# Altium PCB Solens.PcbDoc (part 1 of 3)
Units mil, origin at the board's own origin, x right, y up, seen from the top; angles counter-clockwise.
Board outline 5511.81 x 2755.91 mil, 4 copper layers (Top Layer, Signal Layer 2, Signal Layer 1, Bottom Layer), stack 65.08 mil thick; 208 components, 216 nets, 806 pads, 433 vias.
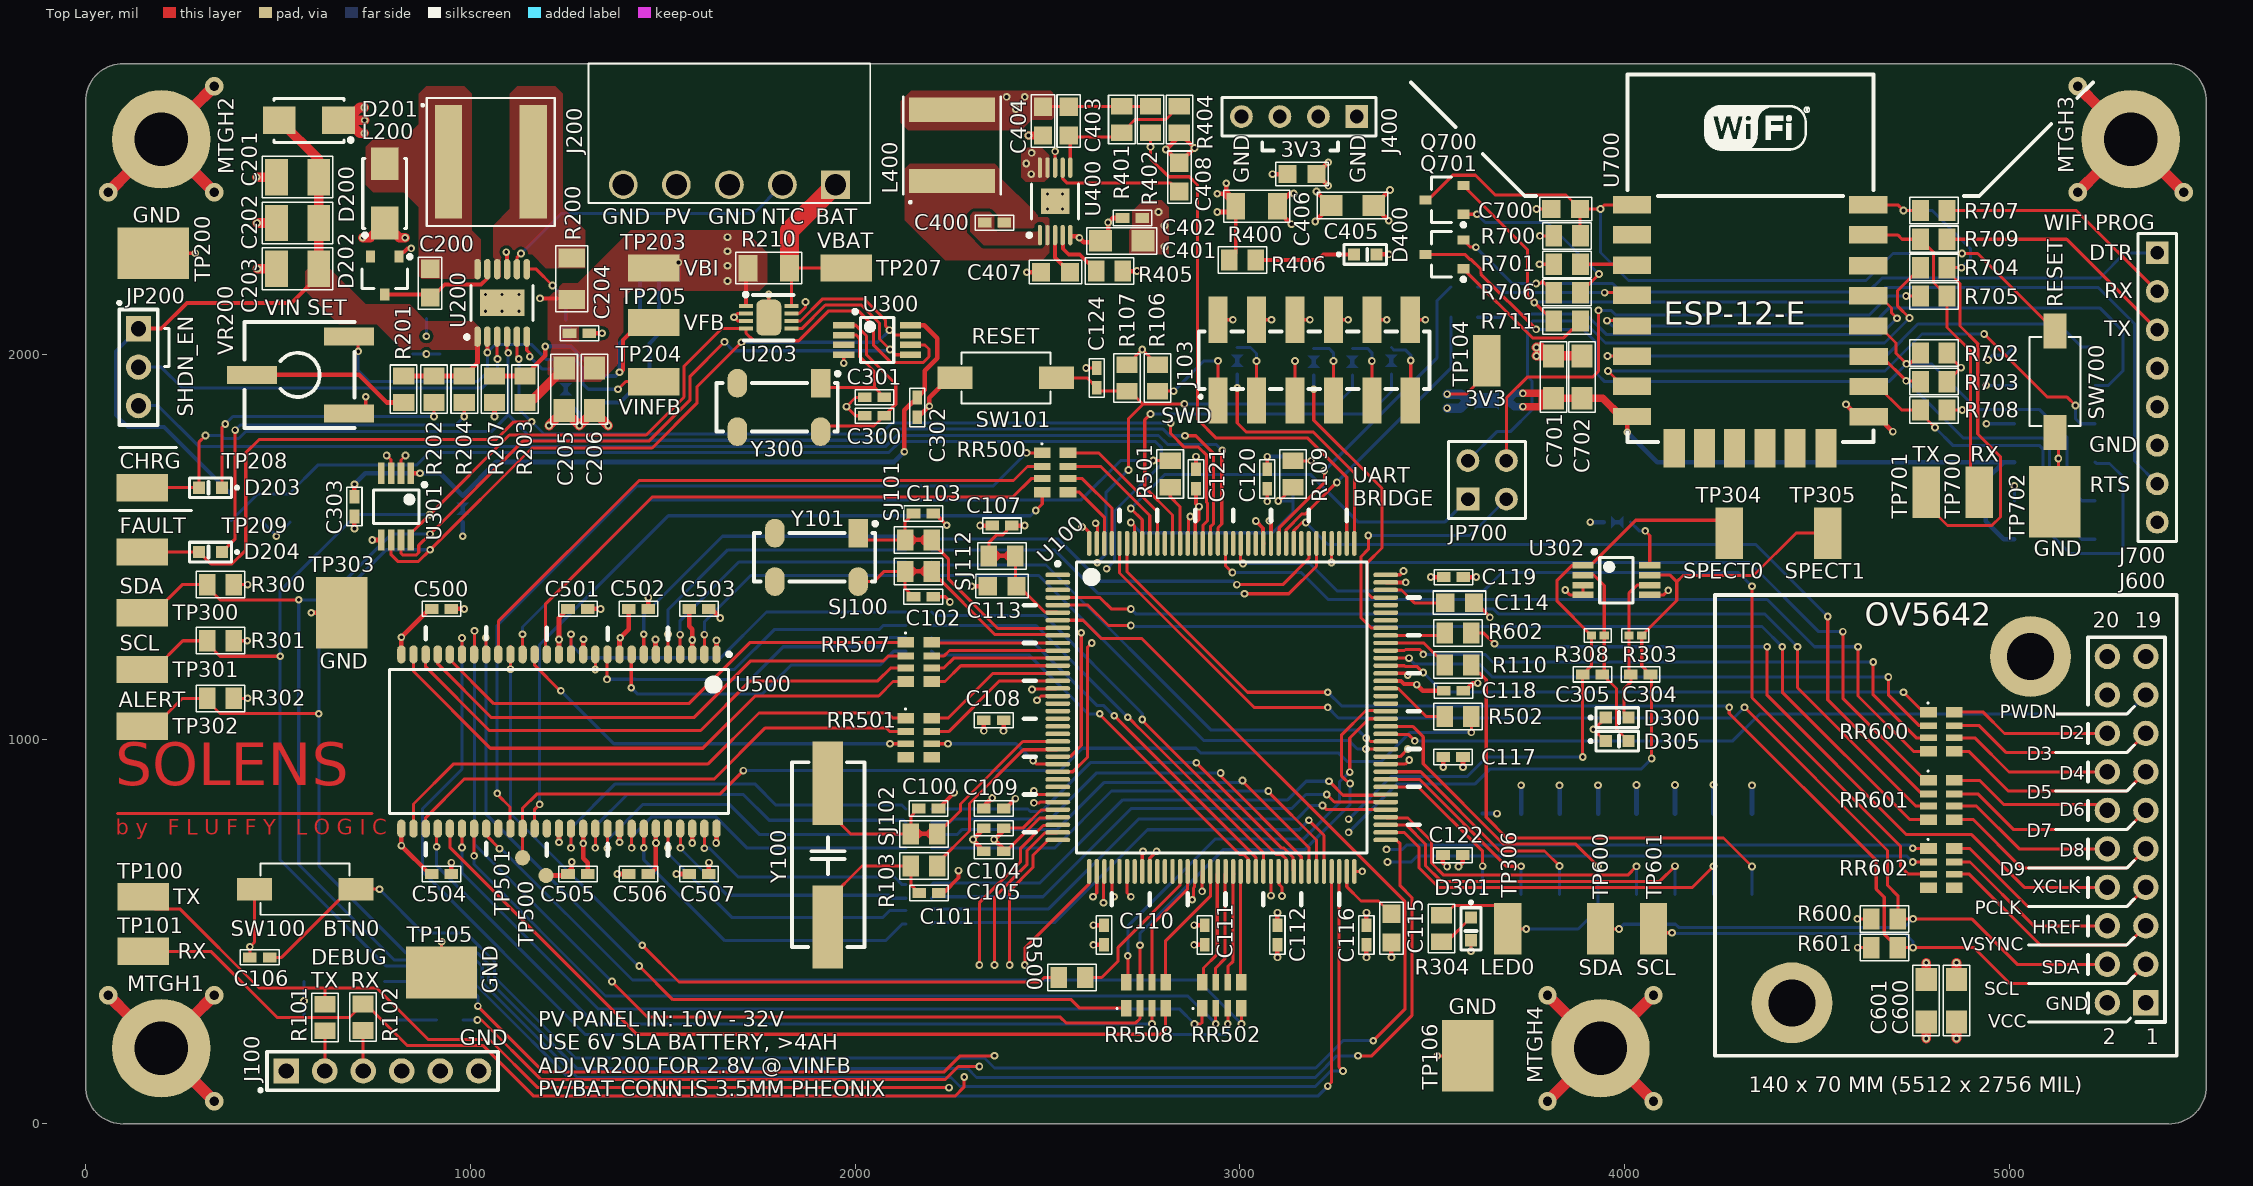
[diagram p0: Top Layer view]
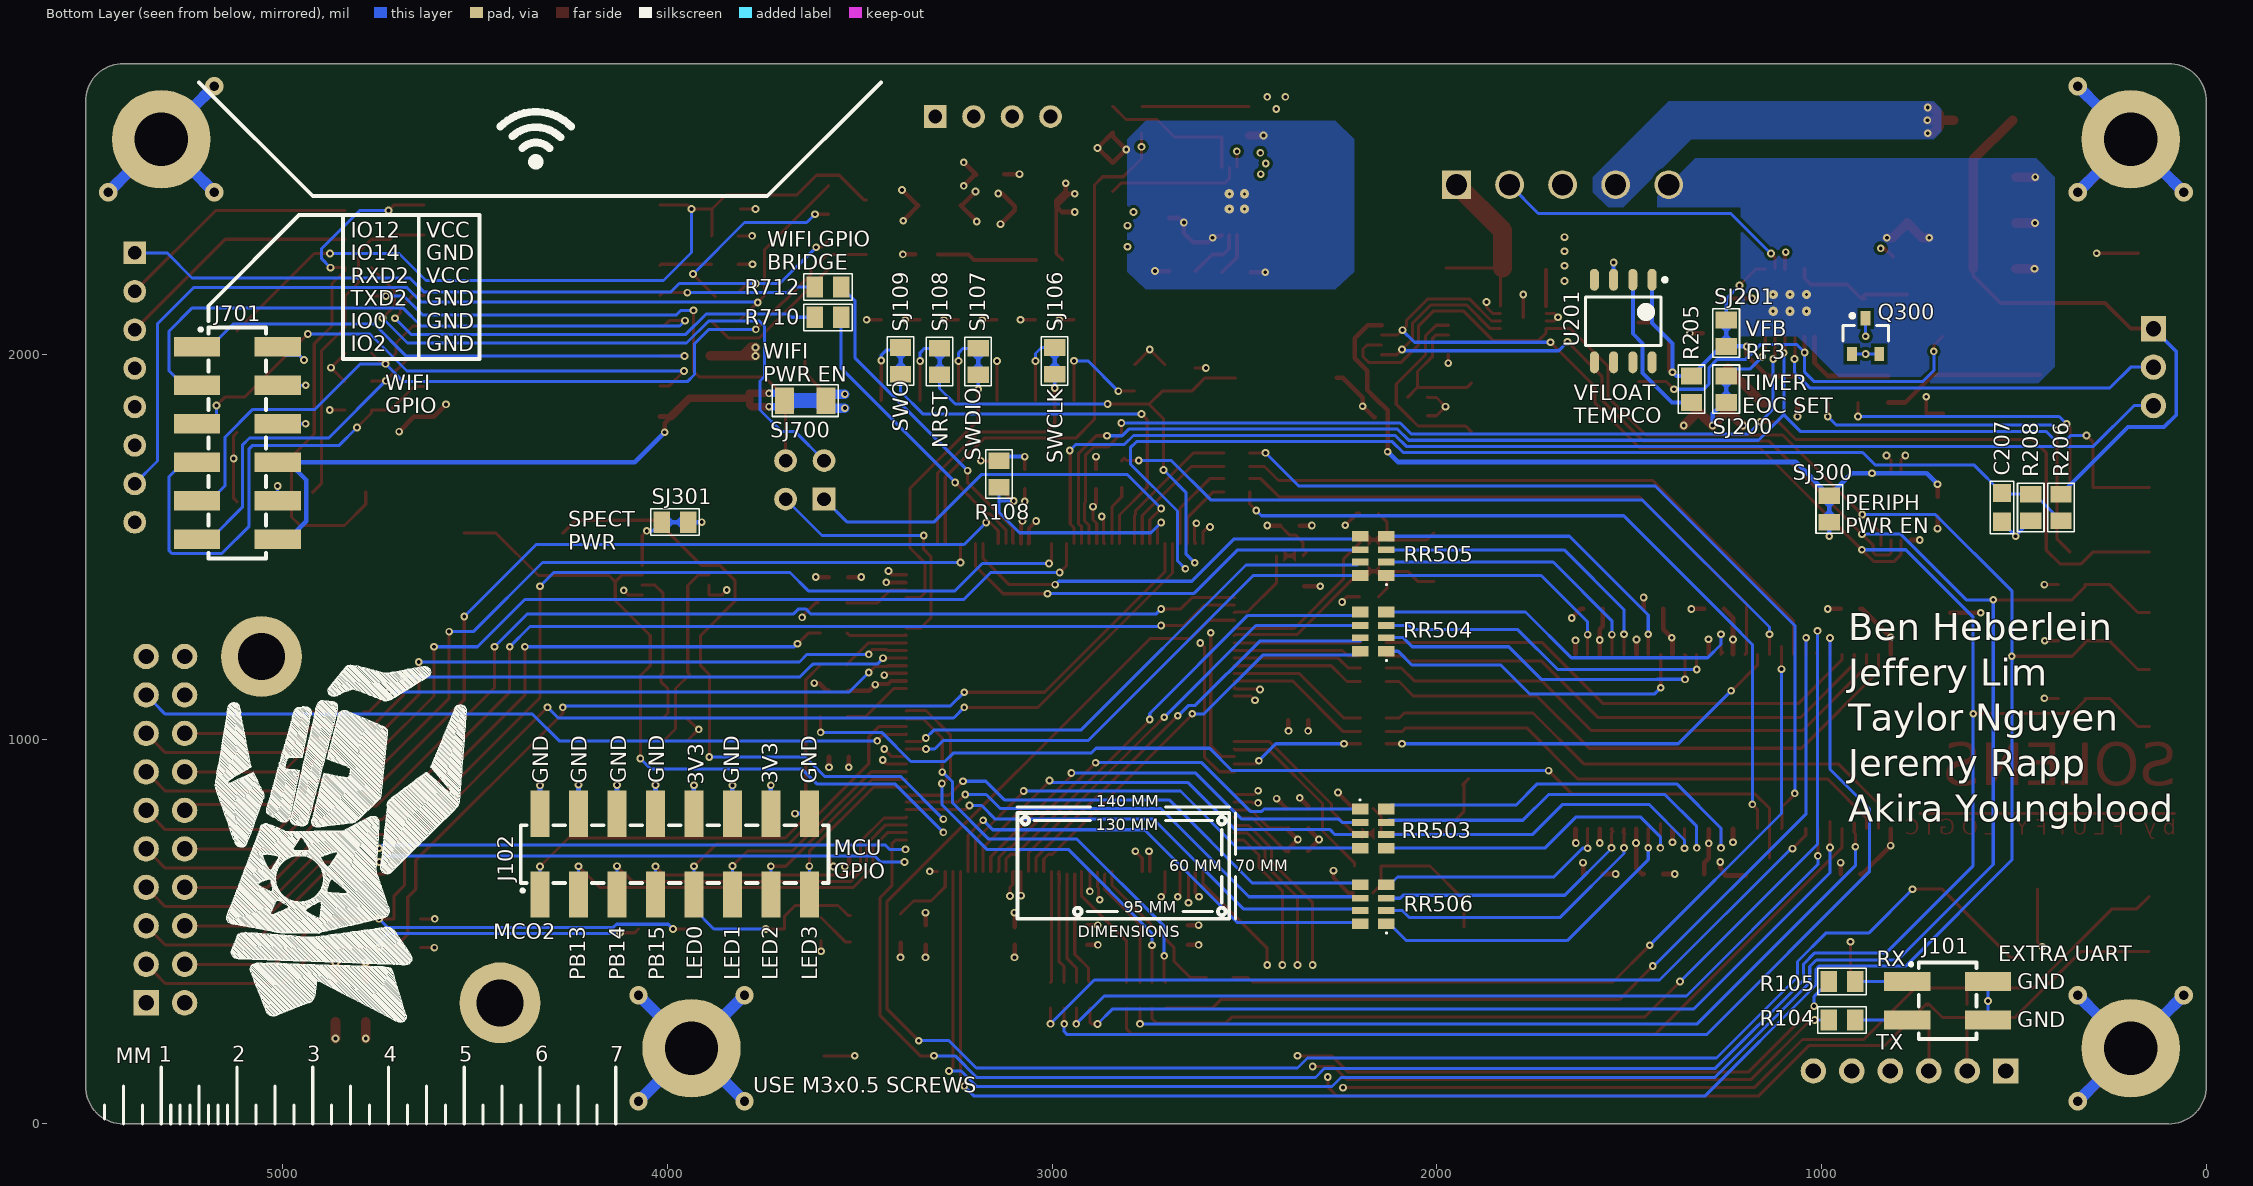
[diagram p1: Bottom Layer view, seen from below]
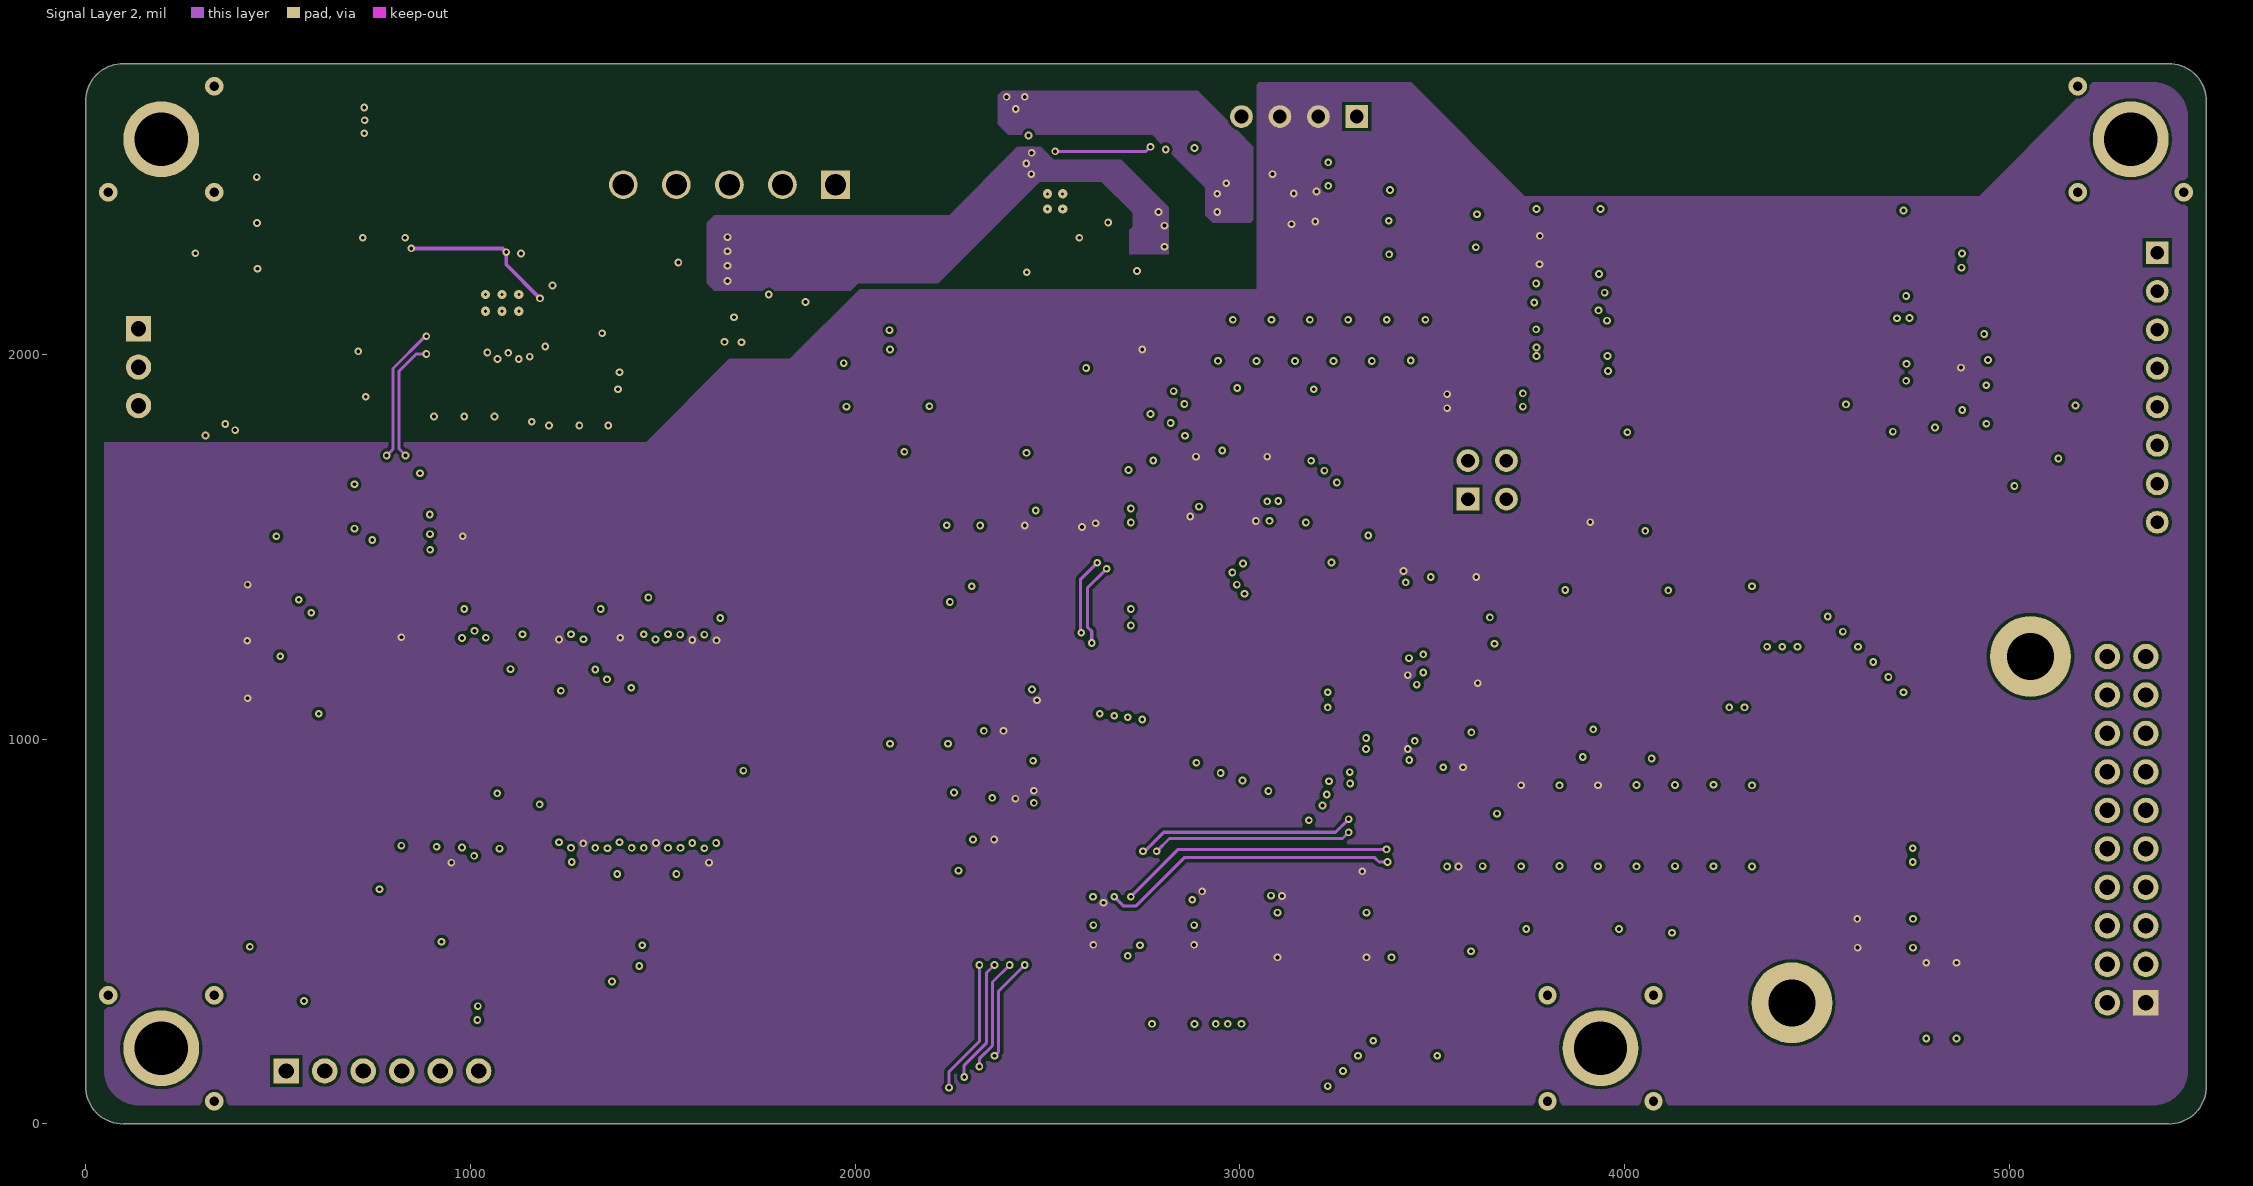
[diagram p2: Signal Layer 2]
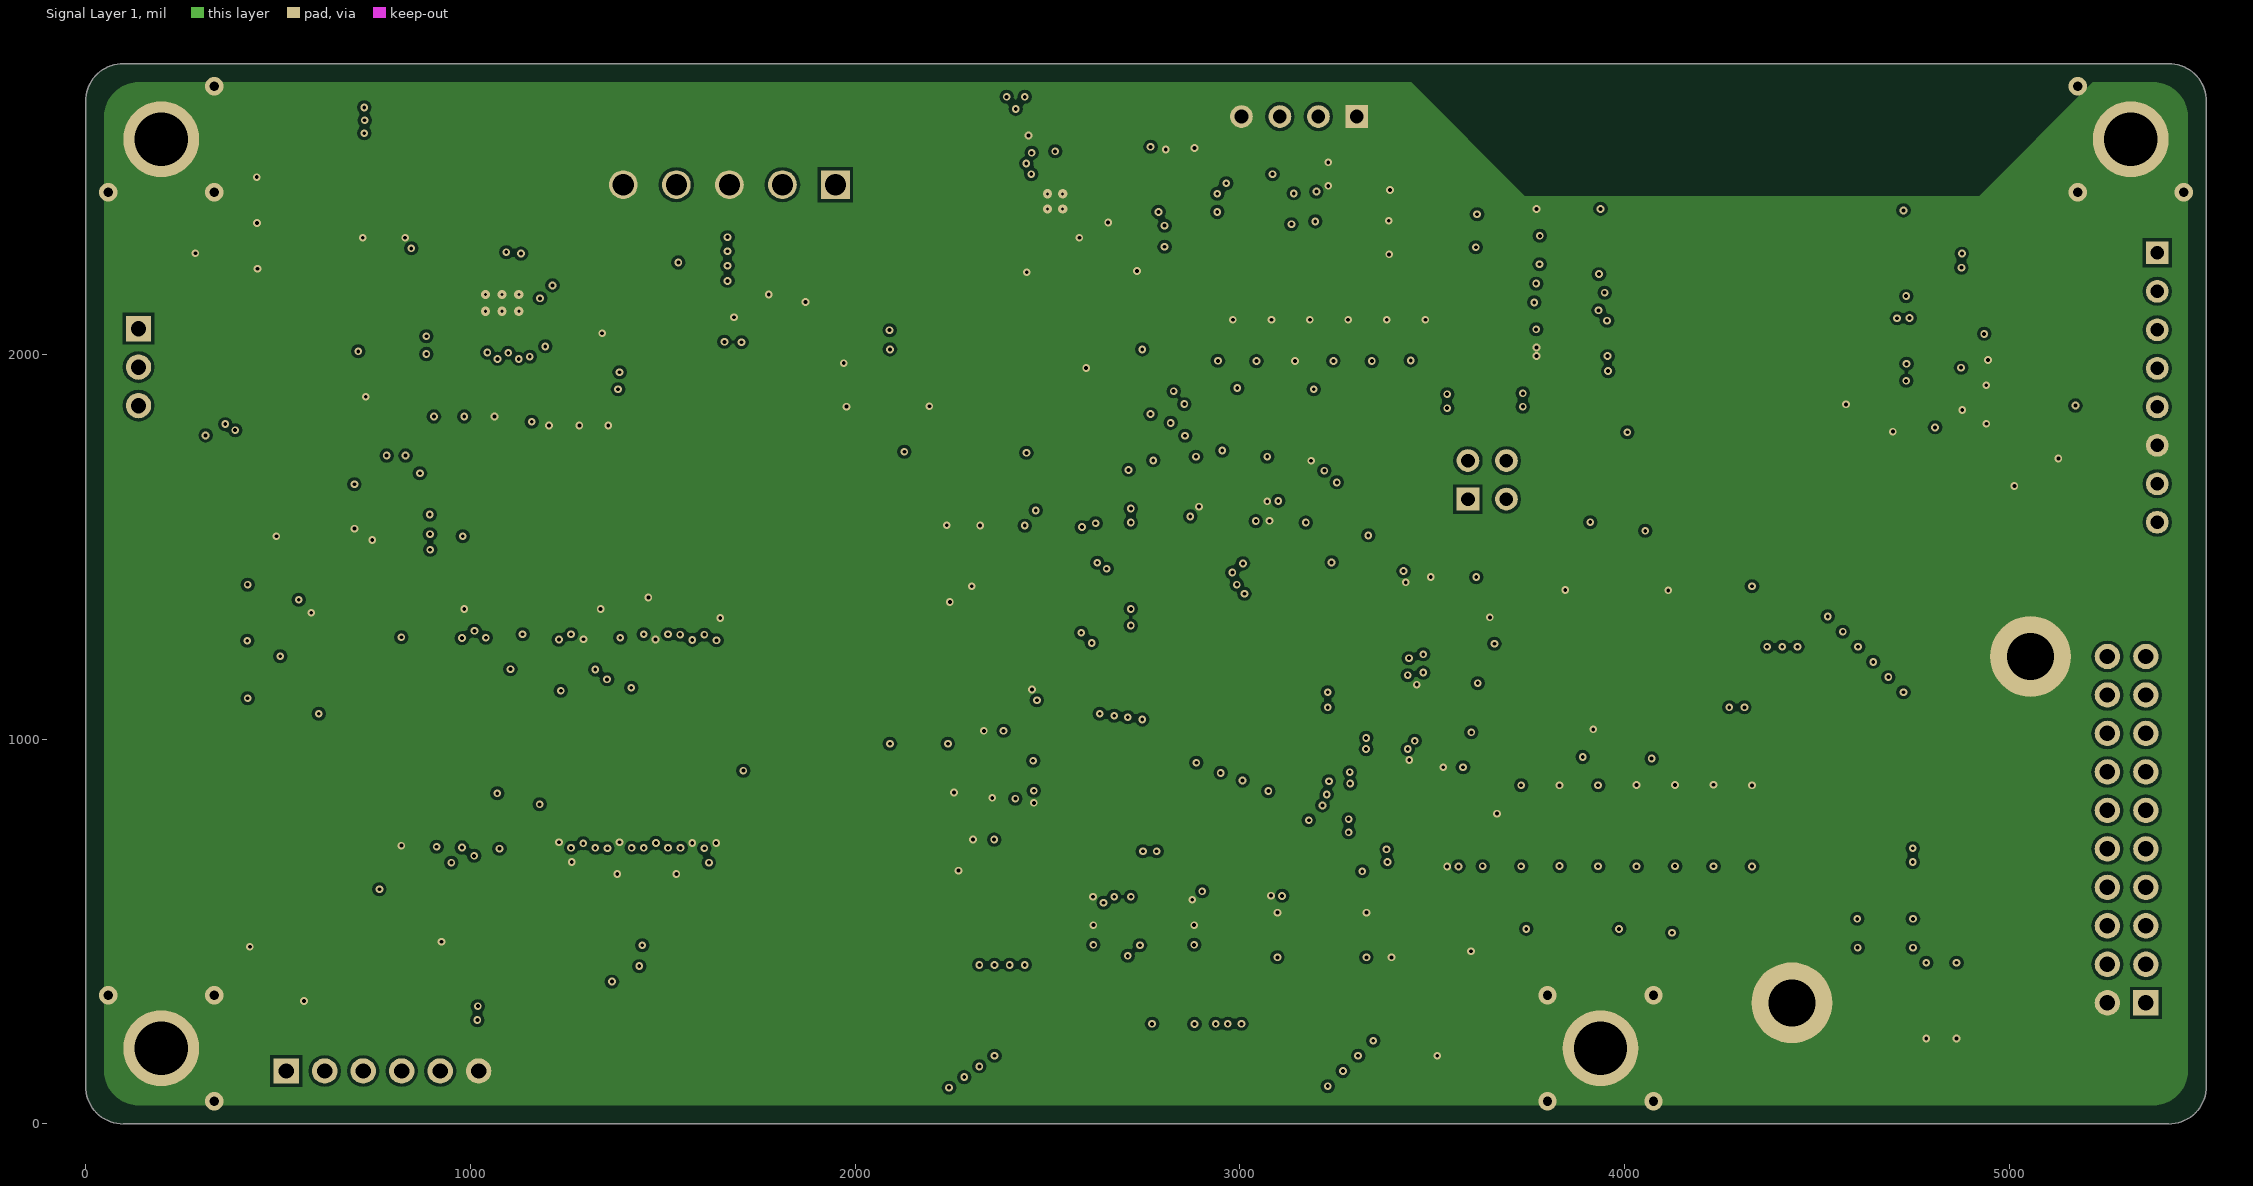
[diagram p3: Signal Layer 1]

## Layer stack, top to bottom
Top Solder: solder mask 0.4, Solder Resist, Dk 3.5
Top Layer: signal copper 1.37
Dielectric 1: core 9.8, 2x2116, Dk 4.2
Signal Layer 2: signal copper 1.37
Dielectric 4: prepreg 40, Dk 4.2
Signal Layer 1: signal copper 1.37
Dielectric 3: core 9.8, 2x2116, Dk 4.2
Bottom Layer: signal copper 1.37
Bottom Solder: solder mask 0.4, Solder Resist, Dk 3.5

## Board outline
0,98.43 ccw(c98.42,98.43) 98.43,0 5413.39,0 ccw(c5413.39,98.43) 5511.81,98.43 5511.81,2657.48 ccw(c5413.39,2657.48) 5413.39,2755.91 98.43,2755.91 ccw(c98.42,2657.48) 0,2657.48

## Design rules (kind name [scope] priority, off if disabled: settings)
Clearance Clearance_SJ [InComponent('SJ*') And (IsFill Or IsPad Or IsTrack) vs InComponent('SJ*') And (IsFill Or IsPad Or IsTrack)] p1: gap=0 // Allow overlapped tracks/pads/fills in SJ*
Clearance [All] p2: gap=8
ComponentClearance ComponentClearance_JP70x [InComponent('JP700') vs InComponent('JP701')] p1: gap=0 collisioncheckmode=3 verticalgap=0 showdistances=FALSE
ComponentClearance ComponentClearance_CAMERA [InComponent('J600') vs InComponent('RR6*') Or InComponent('R6*') Or InComponent('C6*')] p2: gap=0 collisioncheckmode=3 verticalgap=0 showdistances=FALSE
ComponentClearance [All] p3: gap=1 collisioncheckmode=3 verticalgap=10 showdistances=FALSE
HoleSize [All] p1: absolutevalues=TRUE maxlimit=250 minlimit=8 maxpercent=80.000 minpercent=20.000
MaxMinImpedance Width_FAST [InNetClass('FAST')] p1: minimum=70.00 maximum=80.00 // Trace width for high-speed (pseudo-impedance controlled) traces
MinimumSolderMaskSliver [All] p1: minsoldermaskwidth=4
PlaneClearance [All] p1: clearance=12
PolygonConnect PolygonConnect_PowerPlane [(InNet('3V3') OR InNet('GND') OR InNet('NetC400_1'))] p1: connectstyle=Direct reliefconductorwidth=10 reliefentries=4 polygonreliefangle="90 Angle" airgapwidth=10 // Remove thermals to vias/pins on power planes
PolygonConnect PolygonConnect_PWR [InNetClass('PWR')] p2: connectstyle=Direct reliefconductorwidth=10 reliefentries=4 polygonreliefangle="90 Angle" airgapwidth=10 // Remove thermals to vias/pins on power planes
PolygonConnect PolygonConnect_HVY [InNetClass('HVY')] p3: connectstyle=Direct reliefconductorwidth=10 reliefentries=4 polygonreliefangle="90 Angle" airgapwidth=10 // Remove thermals to vias/pins on power planes
PolygonConnect [All] p4: connectstyle=Relief reliefconductorwidth=10 reliefentries=4 polygonreliefangle="90 Angle" airgapwidth=10
RoomDefinition Z2 [InComponentClass('Z2')] p1 off: confinementstyle=ConfineIn formatcopy=TRUE lockcomponents=FALSE outline 2066.93,2165.35 3395.67,2165.35 3444.88,2214.57 3444.88,2805.12 2066.93,2805.12
RoomDefinition Z6 [InComponentClass('Z6')] p2 off: confinementstyle=ConfineIn formatcopy=TRUE lockcomponents=FALSE outline 4183.07,147.64 5561.02,147.64 5561.02,1412.99 4183.07,1412.99
RoomDefinition Z1 [InComponentClass('Z1')] p3 off: confinementstyle=ConfineIn formatcopy=TRUE lockcomponents=FALSE outline -49.21,1771.65 1462.32,1771.65 1663.85,1970.4 1815.01,1970.4 2066.93,2218.83 2066.93,2805.12 -49.21,2805.12
RoomDefinition Z7 [InComponentClass('Z7')] p4 off: confinementstyle=ConfineIn formatcopy=TRUE lockcomponents=FALSE outline 3986.22,1673.23 4625.98,1673.23 4822.83,1476.38 5561.02,1476.38 5561.02,2805.12 3444.88,2805.12 3444.88,2460.63 3444.88,2362.2 3444.88,2214.57 3838.58,1820.87
RoutingVias RoutingVias_PWR [InNetClass('PWR')] p1 off: holewidth=20 width=46 viastyle="Through Hole" minholewidth=20 minwidth=46 maxholewidth=48 maxwidth=64 // Big vias for power nets
RoutingVias [All] p2: holewidth=10 width=20 viastyle="Through Hole" minholewidth=10 minwidth=20 maxholewidth=32 maxwidth=64
ShortCircuit ShortCircuit_SJ [InComponent('SJ*') And (IsFill Or IsPad Or IsTrack) vs InComponent('SJ*') And (IsFill Or IsPad Or IsTrack Or IsRegion)] p1: allowed=TRUE // Allow shorted pads/fills/tracks in SJ*
ShortCircuit ShortCircuit_MTGH [InComponent('MTGH*') And (IsFill Or IsPad Or IsTrack) vs InComponent('MTG*') And (IsFill Or IsPad Or IsTrack)] p2: allowed=TRUE // Allow shorted pads/fills/tracks in SJ*
ShortCircuit [All] p3: allowed=FALSE
SilkToSilkClearance [All] p1: silktosilkclearance=5
SilkToSolderMaskClearance [IsPad] p1: minsilkscreentomaskgap=2 clearancetoexposedcopper=TRUE
SolderMaskExpansion SolderMaskExpansion_VIA [IsVia] p1: expansion=-20
SolderMaskExpansion [All] p2: expansion=3
Width Width_HVY [InNetClass('HVY')] p1: maxlimit=64 minlimit=8 preferedwidth=8
Width Width_MTGH [InComponent('MTGH*')] p2: maxlimit=120 minlimit=8 preferedwidth=8
Width Width_PWR [InNetClass('PWR')] p3: maxlimit=64 minlimit=8 preferedwidth=8 // Expanded width for power nets
Width [All] p4: maxlimit=12 minlimit=7 preferedwidth=8
23 further rules are at their usual default settings.

## Classes and differential pairs
net class HVY: 3V3 NetC400_2
net class SPECT[0..1]: SPECT0 SPECT1
net class SD_D[0..15]: SD_D0 SD_D1 SD_D2 SD_D3 SD_D4 SD_D5 SD_D6 SD_D7 SD_D8 SD_D9 SD_D10 SD_D11 SD_D12 SD_D13 SD_D14 SD_D15
net class SD_A[0..11]: SD_A0 SD_A1 SD_A2 SD_A3 SD_A4 SD_A5 SD_A6 SD_A7 SD_A8 SD_A9 SD_A10 SD_A11
net class PWR: GND NetC403_2 NetD201_1 SENSE SW VBAT VBAT_INT VCC_ESP VIN
net class FAST: CAM_D0 CAM_D1 CAM_D2 CAM_D3 CAM_D4 CAM_D5 CAM_D6 CAM_D7 CAM_HREF CAM_HREF_U CAM_PCLK CAM_PCLK_U CAM_VSYNC CAM_VSYNC_U CAM_XCLK CAM_XCLK_T NetJ600_9 NetJ600_10 NetJ600_11 NetJ600_12 NetJ600_13 NetJ600_14 NetJ600_15 NetJ600_16 SD_A0 SD_A0_T SD_A1 SD_A1_T SD_A2 SD_A2_T SD_A3 SD_A3_T SD_A4 SD_A4_T SD_A5 SD_A5_T SD_A6 SD_A6_T SD_A7 SD_A7_T SD_A8 SD_A8_T SD_A9 SD_A9_T SD_A10 SD_A10_T SD_A11 SD_A11_T SD_BA0 SD_BA0_T SD_BA1 SD_BA1_T SD_CKE1 SD_CKE1_T SD_CLK SD_CLK_T SD_D0 SD_D0_T SD_D1 SD_D1_T SD_D2 SD_D2_T SD_D3 SD_D3_T SD_D4 SD_D4_T SD_D5 SD_D5_T SD_D6 SD_D6_T SD_D7 SD_D7_T SD_D8 SD_D8_T SD_D9 SD_D9_T SD_D10 SD_D10_T SD_D11 SD_D11_T SD_D12 SD_D12_T SD_D13 SD_D13_T SD_D14 SD_D14_T SD_D15 SD_D15_T SD_NBL0 SD_NBL0_T SD_NBL1 SD_NBL1_T SD_NCAS SD_NCAS_T SD_NE1 SD_NE1_T SD_NRAS SD_NRAS_T SD_NWE SD_NWE_T
net class CAM_D[0..7]: CAM_D0 CAM_D1 CAM_D2 CAM_D3 CAM_D4 CAM_D5 CAM_D6 CAM_D7
component class Z7: C700 C701 C702 J700 J701 JP700 Q700 Q701 R700 R701 R702 R703 R704 R705 R706 R707 R708 R709 R710 R711 R712 SJ700 SW700 TP700 TP701 TP702 U700
component class Z6: C600 C601 J600 R600 R601 R602 RR600 RR601 RR602 TP600 TP601
component class Z3: C300 C301 C302 C303 C304 C305 D300 D301 D305 Q300 R300 R301 R302 R303 R304 R308 SJ300 SJ301 TP300 TP301 TP302 TP303 TP304 TP305 TP306 U300 U301 U302 Y300
component class Z1: C100 C101 C102 C103 C104 C105 C106 C107 C108 C109 C110 C111 C112 C113 C114 C115 C116 C117 C118 C119 C120 C121 C122 C124 J100 J101 J102 J103 R101 R102 R103 R104 R105 R106 R107 R108 R109 R110 SJ100 SJ101 SJ102 SJ106 SJ107 SJ108 SJ109 SJ112 SW100 SW101 TP100 TP101 TP104 TP105 TP106 U100 Y100 Y101
component class Z5: C500 C501 C502 C503 C504 C505 C506 C507 R500 R501 R502 RR500 RR501 RR502 RR503 RR504 RR505 RR506 RR507 RR508 TP500 TP501 U500
component class Z4: C400 C401 C402 C403 C404 C405 C406 C407 C408 D400 J400 L400 R400 R401 R402 R404 R405 R406 U400
component class Z2: C200 C201 C202 C203 C204 C205 C206 C207 D200 D201 D202 D203 D204 J200 JP200 L200 R200 R201 R202 R203 R204 R205 R206 R207 R208 R210 SJ200 SJ201 TP200 TP203 TP204 TP205 TP207 TP208 TP209 U200 U201 U203 VR200
component class Solens: MTGH1 MTGH2 MTGH3 MTGH4

## Components (designator, comment, footprint, x,y, rotation, side; value= is the part's Value field where it differs from the comment)
C100 "27p, 16V, 0402" CAP_0402 2190.94,819.88 r0 top
C101 "27p, 16V, 0402" CAP_0402 2191.93,600.39 r0 top
C102 "18p, 16V, 0402" CAP_0402 2177.17,1370.08 r0 top
C103 "18p, 16V, 0402" CAP_0402 2177.17,1586.61 r0 top
C104 "100n, 16V, 0402" CAP_0402 2360.24,768.7 r180 top
C105 "100n, 16V, 0402" CAP_0402 2360.24,708.66 r180 top
C106 "100n, 16V, 0402" CAP_0402 452.76,433.07 r180 top
C107 "100n, 16V, 0402" CAP_0402 2381.89,1555.12 r180 top
C108 "100n, 16V, 0402" CAP_0402 2360.24,1049.21 r180 top
C109 "100n, 16V, 0402" CAP_0402 2360.24,819.88 r180 top
C110 "100n, 16V, 0402" CAP_0402 2646.65,491.14 r90 top
C111 "100n, 16V, 0402" CAP_0402 2908.46,491.14 r90 top
C112 "100n, 16V, 0402" CAP_0402 3097.44,491.14 r90 top
C113 "2u2, 10V, 0805" CAP_0805 2381.89,1397.64 r0 top
C114 "2u2, 10V, 0805" CAP_0805 3570.87,1354.58 r0 top
C115 "2u2, 10V, 0805" CAP_0805 3393.7,508.86 r270 top
C116 "100n, 16V, 0402" CAP_0402 3328.74,491.14 r90 top
C117 "100n, 16V, 0402" CAP_0402 3554.13,953.74 r180 top
C118 "100n, 16V, 0402" CAP_0402 3555.12,1125.98 r180 top
C119 "100n, 16V, 0402" CAP_0402 3555.12,1421.26 r180 top
C120 "100n, 16V, 0402" CAP_0402 3070.87,1676.18 r270 top
C121 "100n, 16V, 0402" CAP_0402 2885.83,1676.18 r270 top
C122 "100n, 16V, 0402" CAP_0402 3553.15,698.82 r180 top
C124 "100n, 16V, 0402" CAP_0402 2627.95,1938.98 r90 top
C200 "1u, 35V, 0805" CAP_0805 895.67,2185.04 r270 top
C201 "4u7, 50V, 1210" CAP_1210 551.18,2460.63 r180 top
C202 "4u7, 50V, 1210" CAP_1210 551.18,2341.51 r180 top
C203 "4u7, 50V, 1210" CAP_1210 551.18,2222.39 r180 top
C204 "100n, 16V, 0402" CAP_0402 1283.46,2055.12 r0 top
C205 "10u, 16V, 1206" CAP_1206 1244.09,1909.45 r270 top
C206 "10u, 16V, 1206" CAP_1206 1322.83,1909.45 r270 top
C207 "1u, 35V, 0805 (DNP)" CAP_0805 531.5,1602.36 r270 bottom
C300 "18p, 16V, 0402 (DNP)" CAP_0402 2050.2,1840.55 r180 top
C301 "18p, 16V, 0402 (DNP)" CAP_0402 2050.2,1888.78 r180 top
C302 "100n, 16V, 0402 (DNP)" CAP_0402 2161.42,1862.2 r270 top
C303 "100n, 16V, 0402 (DNP)" CAP_0402 698.82,1604.33 r270 top
C304 "220p, 16V, 0402 (DNP)" CAP_0402 4041.34,1168.31 r180 top
C305 "220p, 16V, 0402 (DNP)" CAP_0402 3916.34,1168.31 r180 top
C400 "100n, 16V, 0402" CAP_0402 2362.2,2342.52 r0 top
C401 "10u, 16V, 1206" CAP_1206 2692.91,2295.25 r180 top
C402 "100n, 16V, 0402" CAP_0402 2720.47,2354.33 r180 top
C403 "10p, 16V, 0805" CAP_0805 2555.12,2606.3 r90 top
C404 "10u, 10V, 0805" CAP_0805 2488.19,2606.3 r90 top
C405 "47u, 10V, 1206" CAP_1206 3292.32,2386.81 r0 top
C406 "10u, 10V, 0805" CAP_0805 3161.42,2468.5 r180 top
C407 "2u2, 10V, 0805" CAP_0805 2520.67,2213.58 r180 top
C408 "10n, 16V, 0805" CAP_0805 2842.52,2460.63 r90 top
C500 "100n, 16V, 0402" CAP_0402 925.2,1338.58 r0 top
C501 "100n, 16V, 0402" CAP_0402 1279.53,1338.58 r0 top
C502 "100n, 16V, 0402" CAP_0402 1437.01,1338.58 r0 top
C503 "100n, 16V, 0402" CAP_0402 1594.49,1338.58 r0 top
C504 "100n, 16V, 0402" CAP_0402 925.2,649.61 r180 top
C505 "100n, 16V, 0402" CAP_0402 1279.53,649.61 r180 top
C506 "100n, 16V, 0402" CAP_0402 1437.01,649.61 r180 top
C507 "100n, 16V, 0402" CAP_0402 1594.49,649.61 r180 top
C600 "47u, 10V, 1206" CAP_1206 4862.2,320.47 r270 top
C601 "10u, 10V, 1206" CAP_1206 4783.46,320.47 r270 top
C700 "1n, 16V, 0805" CAP_0805 3846.46,2377.95 r180 top
C701 "47u, 10V, 1206" CAP_1206 3814.96,1940.94 r90 top
C702 "10u, 10V, 1206" CAP_1206 3888.78,1940.94 r90 top
D200 "CMSH3-40MA, DO-214AC" "SODFL519X262-2N (CMSH3-40MA)" 777.56,2418.28 r90 top
D201 "CMSH3-40MA, DO-214AC" "SODFL519X262-2N (CMSH3-40MA)" 580.71,2608.27 r180 top
D202 "CMPSH1-4, SOT-23F" "SOT95P240X100-3N (CMPSH1-4 TR)" 777.56,2204.72 r270 top
D203 "LED, GRN, 0603 (DNP)" LED_0603 324.8,1653.54 r180 top
D204 "LED, GRN, 0603 (DNP)" LED_0603 324.8,1486.22 r180 top
D300 "LED, GRN, 0603 (DNP)" LED_0603 3980.31,1056.1 r0 top
D301 "LED, RED, 0603 (DNP)" LED_0603 3600.39,506.89 r270 top
D305 "LED, RED, 0603 (DNP)" LED_0603 3980.31,995.08 r0 top
D400 "LED, RED, 0603 (DNP)" LED_0603 3325.79,2259.84 r0 top
J100 "HDR_1x6_100TH_THT" HDR_100TH_1X6 521.65,137.8 r90 top
J101 "HDR_2x2_100TH_SMT (DNP)" HDR_100TH_2X2_SMT 777.56,370.08 r180 bottom
J102 "HDR_2x8_100TH_SMT (DNP)" HDR_100TH_2X8_SMT 4330.71,596.46 r90 bottom
J103 "HDR_2x8_100TH_SMT" HDR_100TH_2X6_SMT 2942.91,1879.92 r90 top
J200 "691322110005, 5p 3.5mm Euro" 691322110005 1673.23,2440.94 r180 top
J400 "HDR_1x4_100TH_THT (DNP)" HDR1X4 3303.94,2618.11 r180 top
J600 "SOK_2x10_100TH_THT" OV5642_HDR_2X10 5354.33,314.96 r0 top
J700 "HDR_1x8_100TH_THT" HDR1X8 5383.86,2263.78 r270 top
J701 "HDR_2x6_100TH_SMT (DNP)" HDR_100TH_2X6_SMT 5222.44,2019.69 r180 bottom
JP200 "HDR_1x3_100TH_THT" HDR_100TH_1X3 137.8,2066.93 r0 top
JP700 "HDR_2x2_100TH_THT" HDR2X2 3592.52,1624.02 r0 top
L200 "NRS8040T150MJGJ" IND_TAIYO_NRS804 1053.15,2500 r0 top
L400 "NR6028T2R2N" IND_TAIYO_NR6028 2251.79,2543.31 r90 top
MTGH1 "M3x0.5 (DNP)" MTGH-M3x0.5-ClipSW 196.85,196.85 r0 top
MTGH2 "M3x0.5 (DNP)" MTGH-M3x0.5-ClipNW 196.85,2559.06 r0 top
MTGH3 "M3x0.5 (DNP)" MTGH-M3x0.5-ClipNE 5314.96,2559.06 r0 top
MTGH4 "M3x0.5 (DNP)" MTGH-M3X0.5 3937.01,196.85 r0 top
Q300 "MMBT3904, SOT-23 (DNP)" SOT90P240X110-3N 885.83,2047.24 r90 bottom
Q700 "2N7002, SOT-23" "SOT95P240X100-3N (CMPSH1-4 TR)" 3531.5,2401.57 r180 top
Q701 "2N7002, SOT-23" "SOT95P240X100-3N (CMPSH1-4 TR)" 3531.5,2259.84 r180 top
R101 "100R, 1/8W, 0805" RES_0805 622.05,276.57 r90 top
R102 "100R, 1/8W, 0805" RES_0805 721.46,277.56 r90 top
R103 "220R, 1/8W, 0805" RES_0805 2179.13,670.28 r180 top
R104 "100R, 1/8W, 0805 (DNP)" RES_0805 946.85,270.08 r0 bottom
R105 "100R, 1/8W, 0805 (DNP)" RES_0805 946.85,370.08 r0 bottom
R106 "0R, 1/8W, 0805 (DNP)" RES_0805 2785.43,1938.98 r270 top
R107 "0R, 1/8W, 0805 (DNP)" RES_0805 2706.69,1938.98 r270 top
R108 "0805 (DNP)" RES_0805 3137.8,1688.98 r270 bottom
R109 "510R, 1/8W, 0805" RES_0805 3137.8,1688.98 r90 top
R110 "49R9, 1/8W, 0805 (DNP)" RES_0805 3566.93,1192.91 r0 top
R200 "80m, 1/4W, 1%, 1206" RES_1206 1263.78,2196.85 r90 top
R201 "22k, 1/8W, 0805" RES_0805 826.77,1909.45 r270 top
R202 "22k, 1/8W, 0805" RES_0805 905.51,1909.45 r270 top
R203 "511k, 1/8W, 0805" RES_0805 1141.73,1909.45 r90 top
R204 "22k, 1/8W, 0805" RES_0805 984.25,1909.45 r270 top
R205 "2k4, 1/8W, 0805 (DNP)" RES_0805 1338.58,1909.45 r90 bottom
R206 "22k, 1/8W, 0805" RES_0805 377.95,1602.36 r270 bottom
R207 "487k, 1/8W, 0805" RES_0805 1062.99,1909.45 r270 top
R208 "1k, 1/8W, 0805" RES_0805 456.69,1602.36 r270 bottom
R210 "25m, 1/2W, 1%, 1206" RES_1206 1775.59,2224.41 r0 top
R300 "3k3, 1/8W, 0805 (DNP)" RES_0805 350.39,1401.57 r180 top
R301 "3k3, 1/8W, 0805 (DNP)" RES_0805 350.39,1255.91 r180 top
R302 "3k3, 1/8W, 0805 (DNP)" RES_0805 350.39,1106.3 r180 top
R303 "1M, 1/16W, 0402 (DNP)" RES_0402 4027.56,1269.69 r180 top
R304 "330, 1/8W, 0805 (DNP)" RES_0805 3523.62,507.87 r270 top
R308 "1M, 1/16W, 0402 (DNP)" RES_0402 3930.12,1269.69 r180 top
R400 "0R, 1/2W, 1206" RES_1206 3043.31,2384.84 r180 top
R401 "1M, 1/8W, 0805" RES_0805 2692.91,2610.24 r90 top
R402 "100k, 1/8W, 0805" RES_0805 2767.72,2610.24 r90 top
R404 "309k, 1/8W, 0805" RES_0805 2842.52,2610.24 r90 top
R405 "20k5, 1/8W, 0805" RES_0805 2661.42,2216.54 r0 top
R406 "330, 1/8W, 0805" RES_0805 3006.89,2245.08 r180 top
R500 "49R9, 1/8W, 0805" RES_0805 2563.98,380.91 r180 top
R501 "49R9, 1/8W, 0805" RES_0805 2818.9,1688.98 r90 top
R502 "49R9, 1/8W, 0805" RES_0805 3566.93,1059.06 r0 top
R600 "3k3, 1/8W, 0805" RES_0805 4675.2,533.07 r0 top
R601 "3k3, 1/8W, 0805" RES_0805 4675.2,458.27 r0 top
R602 "49R9, 1/8W, 0805" RES_0805 3566.93,1275.59 r180 top
R700 "10k, 1/8W, 0805" RES_0805 3850.39,2308.05 r180 top
R701 "10k, 1/8W, 0805" RES_0805 3850.39,2234.2 r180 top
R702 "10k, 1/8W, 0805" RES_0805 4803.15,2003.83 r180 top
R703 "10k, 1/8W, 0805" RES_0805 4803.15,1929.13 r180 top
R704 "100R, 1/8W, 0805" RES_0805 4803.15,2225.37 r180 top
R705 "100R, 1/8W, 0805" RES_0805 4803.15,2151.52 r180 top
R706 "10k, 1/8W, 0805" RES_0805 3850.39,2160.36 r180 top
R707 "100R, 1/8W, 0805" RES_0805 4803.15,2374.02 r0 top
R708 "10k, 1/8W, 0805" RES_0805 4803.15,1855.29 r180 top
R709 "100R, 1/8W, 0805" RES_0805 4803.15,2299.21 r0 top
R710 "100R, 1/8W, 0805 (DNP)" RES_0805 3582.68,2096.46 r180 bottom
R711 "10k, 1/8W, 0805" RES_0805 3850.39,2086.51 r180 top
R712 "100R, 1/8W, 0805 (DNP)" RES_0805 3582.68,2175.2 r180 bottom
RR500 "CRA6S849.9ACT-ND" CAC-80P319X150-8M 2519.69,1692.91 r0 top
RR501 "CRA6S849.9ACT-ND" CAC-80P319X150-8M 2165.35,1003.94 r0 top
RR502 "CRA6S849.9ACT-ND" CAC-80P319X150-8M 2952.76,334.65 r90 top
RR503 "CRA6S833CT-ND" CAC-80P319X150-8M 2165.35,767.72 r180 bottom
RR504 "CRA6S833CT-ND" CAC-80P319X150-8M 2165.35,1279.53 r0 bottom
RR505 "CRA6S833CT-ND" CAC-80P319X150-8M 2165.35,1476.38 r0 bottom
RR506 "CRA6S833CT-ND" CAC-80P319X150-8M 2165.35,570.87 r0 bottom
RR507 "CRA6S849.9ACT-ND" CAC-80P319X150-8M 2165.35,1200.79 r0 top
RR508 "CRA6S849.9ACT-ND" CAC-80P319X150-8M 2755.91,334.65 r90 top
RR600 "CRA6S833CT-ND" CAC-80P319X150-8M 4822.83,1019.29 r0 top
RR601 "CRA6S833CT-ND" CAC-80P319X150-8M 4822.83,842.13 r0 top
RR602 "CRA6S833CT-ND" CAC-80P319X150-8M 4822.83,664.96 r0 top
SJ100 "SJ, 0805 (DNP)" SJ_0805 2164.37,1436.02 r180 top
SJ101 "SJ, 0805 (DNP)" SJ_0805 2164.37,1517.72 r180 top
SJ102 "SJ, 0805 (DNP)" SJ_0805 2179.13,753.94 r180 top
SJ106 "SJ, 0805 (DNP)" SJ_0805 2993.11,1983.27 r90 bottom
SJ107 "SJ, 0805 (DNP)" SJ_0805 3191.93,1981.3 r90 bottom
SJ108 "SJ, 0805 (DNP)" SJ_0805 3292.32,1981.3 r90 bottom
SJ109 "SJ, 0805 (DNP)" SJ_0805 3393.7,1983.27 r90 bottom
SJ112 "SJ, 0805 (DNP)" SJ_0805 2381.89,1476.38 r0 top
SJ200 "SJ, 0805 (DNP)" SJ_0805 1248.03,1909.45 r270 bottom
SJ201 "SJ, 0805 (DNP)" SJ_0805 1248.03,2055.12 r270 bottom
SJ300 "SJ, 0805 (DNP)" SJ_0805 980.32,1598.43 r90 bottom
SJ301 "SJ, 0805 (DNP)" SJ_0805 3980.31,1563.98 r180 bottom
SJ700 "SJ, 1206 (DNP)" SJ_1206 3641.73,1879.92 r0 bottom
SW100 "434121043816, TACT SPST NO" 4341x10438x6 570.87,610.24 r180 top
SW101 "434121043816, TACT SPST NO" 4341x10438x6 2391.73,1938.98 r180 top
SW700 "434121043816, TACT SPST NO" 4341x10438x6 5118.11,1929.13 r90 top
TP100 "TP (DNP)" TP_SMALL 149.61,590.55 r180 top
TP101 "TP (DNP)" TP_SMALL 149.61,448.82 r180 top
TP104 "TP (DNP)" TP_SMALL 3641.73,1983.27 r270 top
TP105 "TP (DNP)" TP_LARGE 925.2,393.7 r180 top
TP106 "TP (DNP)" TP_LARGE 3592.52,177.17 r90 top
TP200 "TP (DNP)" TP_LARGE 176.18,2262.8 r180 top
TP203 "TP (DNP)" TP_SMALL 1476.38,2224.41 r180 top
TP204 "TP (DNP)" TP_SMALL 1476.38,1929.13 r180 top
TP205 "TP (DNP)" TP_SMALL 1476.38,2082.68 r0 top
TP207 "TP (DNP)" TP_SMALL 1976.38,2224.41 r0 top
TP208 "TP (DNP)" TP_SMALL 147.64,1653.54 r0 top
TP209 "TP (DNP)" TP_SMALL 147.64,1486.22 r0 top
TP300 "TP (DNP)" TP_SMALL 147.64,1328.74 r180 top
TP301 "TP (DNP)" TP_SMALL 147.64,1181.1 r180 top
TP302 "TP (DNP)" TP_SMALL 147.64,1033.46 r180 top
TP303 "TP (DNP)" TP_LARGE 666.34,1328.74 r270 top
TP304 "TP (DNP)" TP_SMALL 4271.65,1535.43 r270 top
TP305 "TP (DNP)" TP_SMALL 4527.56,1535.43 r270 top
TP306 "TP (DNP)" TP_SMALL 3695.87,506.89 r270 top
TP500 "TP (DNP)" TP_TINY 1196.85,645.67 r90 top
TP501 "TP (DNP)" TP_TINY 1135.83,691.93 r90 top
TP600 "TP (DNP)" TP_SMALL 3937.01,506.89 r90 top
TP601 "TP (DNP)" TP_SMALL 4074.8,506.89 r90 top
TP700 "TP (DNP)" TP_SMALL 4921.26,1641.73 r270 top
TP701 "TP (DNP)" TP_SMALL 4783.46,1641.73 r90 top
TP702 "TP (DNP)" TP_LARGE 5118.11,1617.13 r270 top
U100 "STM32F429ZIT6, LQFP-144" TSQFP50P2200X2200X160-144M 2952.76,1082.68 r0 top locked
U200 "LT3652, MSOP-12" "TSOP65P490X110_HS-13N (LT3652)" 1082.68,2133.86 r90 top
U201 "LM234SM, SOIC-8 (DNP)" "SOIC127P600X175-8N (LM234)" 1515.75,2086.61 r270 bottom
U203 "LTC2943, DFN-8" DFN8-3X3 1720.47,2125.98 r270 top
U300 "MCP79412, MSOP-8 (DNP)" TSOP65P490X110-8N 2057.09,2037.4 r0 top
U301 "EMC1412, MSOP-8 (DNP)" TSOP65P490X110-8N 807.09,1604.33 r270 top
U302 "LTC2055, MSOP-8 (DNP)" TSOP65P490X110-8N 3978.35,1413.39 r0 top
U400 "LT8608, MSOP-10" TSSOP50P490X110_HS-11N 2519.69,2397.64 r90 top
U500 "IS42S16400J, TSOP-54" TSOP80P1170X120-54N 1230.32,994.09 r270 top locked
U700 "ESP8266-12E (DNP)" "ESP8266 ESP-12-E" 4671.87,1742.56 r0 top
VR200 "3361P-1-103GLF" RES_3361P 433.07,1946.75 r90 top
Y100 "9C-8.000MEEJ-T" HC-49S 1929.13,511.81 r90 top
Y101 "ABS25-32.768KHZ-T" XTAL-SOJ-4 2007.87,1535.43 r270 top
Y300 "ABS25-32.768KHZ-T (DNP)" XTAL-SOJ-4 1910.43,1925.2 r270 top

## Footprints (in the part's own frame and the unit in brackets; to place one, negate y for a bottom-side part, rotate by r counter-clockwise, add the part's x,y. Pads: shape width x height; smd on the part's side, far side on the other; paste and mask are expansions set on the pad)
4341x10438x6 [mm] "6.0*3.5mm vertical type, SMD, height 4.3mm, white actuator, 260gf, T&R"
  rect 2.3x1.5 smd: 1(-3.35,0) 2(3.35,0)
  silkscreen extent -2.94,-1.69 2.94,1.69, body extent -4,-1.75 4,1.75, height 4.31
691322110005 [mm] "3,50mm - PCB Horizontal - 05p"
  rect 1.9x1.9 hole 1.4: 1(-7,0)
  round 1.9 hole 1.4: 2(-3.5,0) 3(0,0) 4(3.5,0) 5(7,0)
  silkscreen extent -9.3,-8 9.3,1.2, body extent -9.5,-8 9.5,1.2, height 7.31
CAC-80P319X150-8M [mm] "Chip Array, ConvexS, 8-Leads, Pitch 0.80mm,  Body 3.20x1.50mm, for Vishay CRA06S"
  rect 1.1x0.7 smd: 1(-0.85,1.295) 4(-0.85,-1.295) 5(0.85,-1.295) 8(0.85,1.295)
  rect 1.1x0.45 smd: 2(-0.85,0.4) 3(-0.85,-0.4) 6(0.85,-0.4) 7(0.85,0.4)
  silkscreen extent -0.92,1.85 -0.82,1.95, body extent -0.82,-1.68 0.82,1.68, height 0.6
CAP_0402 [mm]
  rect 0.9x0.65 smd: 1(-0.65,0) 2(0.65,0)
  silkscreen extent -1.28,-0.5 1.28,0.5, body extent -0.5,-0.25 0.5,0.25, height 0.55
CAP_0805 [mm]
  rect 1.2x1.2 smd: 1(-0.95,0) 2(0.95,0)
  silkscreen extent -1.73,-0.77 1.73,0.77, body extent -1,-0.63 1,0.63, height 0.75
CAP_1206 [mm]
  rect 1.5x1.4 smd: 1(-1.4,0) 2(1.4,0)
  silkscreen extent -2.32,-0.87 2.32,0.87, body extent -1.5,-0.7 1.5,0.7, height 1.8
CAP_1210 [mm]
  rect 1.5x2.4 smd: 1(-1.4,0) 2(1.4,0)
  silkscreen extent -2.32,-1.38 2.32,1.38, body extent -1.5,-1.1 1.5,1.1, height 2
DFN8-3X3 [mm] "LTC2943"
  rect 0.25x0.9 smd: 1(0,-0.1) 2(0.5,-0.1) 3(1,-0.1) 4(1.5,-0.1) 5(1.5,2.9) 6(1,2.9) 7(0.5,2.9) 8(0,2.9)
  rrect50% 2.38x1.65 smd: 9(0.775,1.4)
  silkscreen extent -0.87,-0.25 2.27,3.03, body extent -0.72,-0.1 2.28,2.9, height 0.75
"ESP8266 ESP-12-E" [mil] "ESP8266 ESP-12-E"
  rect 100x45 smd: 1(-653,646) 2(-653,568) 3(-653,489) 4(-653,411) 5(-653,331) 6(-653,253) 7(-653,175) 8(-653,96) 15(-38,95) 16(-38,174) 17(-38,252) 18(-39,331) 19(-39,410) 20(-39,488) 21(-39,568) 22(-39,646)
  rect 55x100 smd: 9(-543,14) 10(-465,14) 11(-387,14) 12(-307,14) 13(-229,14) 14(-149,14)
  silkscreen extent -665,30 -25,985, body extent -661,37 -31,982, height 86
HC-49S [mm] "Crystal"
  rect 5.5x2 smd: 1(0,0) 2(9.5,0)
  silkscreen extent -1.33,-2.42 10.87,2.38, body extent -0.95,-2.4 10.45,2.4, height 3.8
HDR1X4 [mm] "Connector; Header; 4 Position"
  rect 1.5x1.5 hole 0.9: 1(0,0)
  round 1.5 hole 0.9: 2(2.54,0) 3(5.08,0) 4(7.62,0)
  silkscreen extent -1.27,-1.27 8.89,1.27
HDR1X8 [mm] "Connector; Header; 8 Position"
  rect 1.5x1.5 hole 0.9: 1(0,0)
  round 1.5 hole 0.9: 2(2.54,0) 3(5.08,0) 4(7.62,0) 5(10.16,0) 6(12.7,0) 7(15.24,0) 8(17.78,0)
  silkscreen extent -1.27,-1.27 19.05,1.27
HDR2X2 [mm] "Connector; Header; 2x2 Position"
  rect 1.5x1.5 hole 0.9: 1(0,0)
  round 1.5 hole 0.9: 2(0,2.54) 3(2.54,0) 4(2.54,2.54)
  silkscreen extent -1.27,-1.27 3.81,3.81
HDR_100TH_1X3 [mil] "100TH pin header 1x3 vertical"
  rect 66x66 hole 40: 1(0,0)
  round 66 hole 40: 2(0,-100) 3(0,-200)
  silkscreen extent -53,-250 50,70
HDR_100TH_1X6 [mil] "100TH pin header 1x6 vertical"
  rect 66x66 hole 40: 1(0,0)
  round 66 hole 40: 2(0,-100) 3(0,-200) 4(0,-300) 5(0,-400) 6(0,-500)
  silkscreen extent -53,-550 50,70
HDR_100TH_2X2_SMT [mil] "100TH pin header, 2x2, SMT"
  rect 120x50 smd: 1(0,0) 2(210,0) 3(0,-100) 4(210,-100)
  silkscreen extent 7,-150 180,50
HDR_100TH_2X6_SMT [mil] "100TH pin header, 2x6, SMT"
  rect 120x50 smd: 1(0,0) 2(210,0) 3(0,-100) 4(210,-100) 5(0,-200) 6(210,-200) 7(0,-300) 8(210,-300) 9(0,-400) 10(210,-400) 11(0,-500) 12(210,-500)
  silkscreen extent 7,-550 180,50
HDR_100TH_2X8_SMT [mil] "100TH pin header, 2x8, SMT"
  rect 120x50 smd: 1(0,0) 2(210,0) 3(0,-100) 4(210,-100) 5(0,-200) 6(210,-200) 7(0,-300) 8(210,-300) 9(0,-400) 10(210,-400) 11(0,-500) 12(210,-500) 13(0,-600) 14(210,-600) 15(0,-700) 16(210,-700)
  silkscreen extent 7,-750 180,50
IND_TAIYO_NR6028 [mil]
  rect 63x224 smd: 1(-92.5,0) 2(92.5,0)
  silkscreen extent -151,-127 127,127, body extent -118,-118 118,118, height 110
IND_TAIYO_NRS804 [mil]
  rect 70.5x295 smd: 1(-110.25,0) 2(110.25,0)
  silkscreen extent -180,-166 166,166, body extent -157,-157 157,157, height 157
LED_0603 [mm]
  rect 0.8x0.8 smd: 1(-0.75,0) 2(0.75,0)
  silkscreen extent -1.85,-0.65 1.4,0.65
MTGH-M3X0.5 [mm] "M3 x 0.5 pan head mounting hole"
  round 6.5 / inner round 5 / far side round 6.5 hole 3.5 unplated: 1(0,0)
  Top Layer lines w0.75: -3.5,-3.5 -2,-2 ; -3.5,3.5 -2,2 ; 1.5,-1.5 3,-3 3.5,-3.5 ; 2,2 3.5,3.5 ; 3.5,-3.5 3.5,-3.5
  Bottom Layer lines w0.508: 0,0 0,0
  Bottom Layer lines w0.75: -3.5,-3.5 -2,-2 ; -3.5,3.5 -2,2 ; 2,-2 3.5,-3.5 ; 2,2 3.5,3.5
MTGH-M3x0.5-ClipNE [mm] "M3 x 0.5 pan head mounting hole, NE corner clipped"
  round 6.5 / inner round 5 / far side round 6.5 hole 3.5 unplated: 1(0,0)
  Top Layer lines w0.75: -3.5,-3.5 -2,-2 ; -3.5,3.5 -2,2 ; 1.5,-1.5 3,-3 3.5,-3.5 ; 3.5,-3.5 3.5,-3.5
  Bottom Layer lines w0.508: 0,0 0,0
  Bottom Layer lines w0.75: -3.5,-3.5 -2,-2 ; -3.5,3.5 -2,2 ; 2,-2 3.5,-3.5
MTGH-M3x0.5-ClipNW [mm] "M3 x 0.5 pan head mounting hole, NW corner clipped"
  round 6.5 / inner round 5 / far side round 6.5 hole 3.5 unplated: 1(0,0)
  Top Layer lines w0.75: -3.5,-3.5 -2,-2 ; 1.5,-1.5 3,-3 3.5,-3.5 ; 2,2 3.5,3.5 ; 3.5,-3.5 3.5,-3.5
  Bottom Layer lines w0.508: 0,0 0,0
  Bottom Layer lines w0.75: -3.5,-3.5 -2,-2 ; 2,-2 3.5,-3.5 ; 2,2 3.5,3.5
MTGH-M3x0.5-ClipSW [mm] "M3 x 0.5 pan head mounting hole, SW corner clipped"
  round 6.5 / inner round 5 / far side round 6.5 hole 3.5 unplated: 1(0,0)
  Top Layer lines w0.75: -3.5,3.5 -2,2 ; 1.5,-1.5 3,-3 3.5,-3.5 ; 2,2 3.5,3.5 ; 3.5,-3.5 3.5,-3.5
  Bottom Layer lines w0.508: 0,0 0,0
  Bottom Layer lines w0.75: -3.5,3.5 -2,2 ; 2,-2 3.5,-3.5 ; 2,2 3.5,3.5
OV5642_HDR_2X10 [mil] "OV5642 camera 100TH pin header 2x10 vertical"
  rect 66x66 hole 40: 1(0,0)
  round 210 hole 122: 2(-920,0) 2(-300,900)
  round 66 hole 40: 2(-100,0) 3(0,100) 4(-100,100) 5(0,200) 6(-100,200) 7(0,300) 8(-100,300) 9(0,400) 10(-100,400) 11(0,500) 12(-100,500) 13(0,600) 14(-100,600) 15(0,700) 16(-100,700) 17(0,800) 18(-100,800) 19(0,900) 20(-100,900)
  silkscreen extent -1120,-138 80,1060
RES_0402 [mm]
  rect 0.6x0.55 smd: 1(-0.425,0) 2(0.425,0)
  silkscreen extent -0.9,-0.45 0.9,0.45
RES_0805 [mm]
  rect 1.1x1.4 smd: 1(-0.875,0) 2(0.875,0)
  silkscreen extent -1.6,-0.87 1.6,0.87, body extent -1,-0.63 1,0.62, height 0.6
RES_1206 [mm]
  rect 1.25x1.75 smd: 1(-1.375,0) 2(1.375,0)
  silkscreen extent -2.17,-1.05 2.17,1.05, body extent -1.5,-0.7 1.5,0.7, height 0.71
RES_3361P [mm] "POT"
  rect 1.19x3.3 smd: 1(0,0) 2(-2.54,-6.4) 3(2.54,-6.4)
  silkscreen extent -3.5,-6.75 3.5,0.5, body extent -3.5,-6.8 3.5,0.5, height 5.21
SJ_0805 [mm] "0805 net tie"
  rect 1.1x1.4 smd paste-2.54: 1(-0.875,0) 2(0.875,0)
  Top Layer region: -0.325,-0.155 0.325,-0.155 0.325,0.15 -0.325,0.15
  Top Layer region: 0,0 0.4,-0.4 0.4,0.4
  Top Layer region: 0,0 -0.4,0.4 -0.4,-0.4
  silkscreen extent -1.6,-0.87 1.6,0.87
SJ_1206 [mm] "A big fat solder jumper for high-current"
  rect 1.25x1.75 smd: 1(-1.375,0) 2(1.375,0)
  Top Layer region: -0.7,0.5 0.7,0.5 0.7,-0.5 -0.7,-0.5
  Top Layer region: -0.2,0 -0.8,0.6 -0.8,-0.6
  Top Layer region: 0.2,0 0.8,-0.6 0.8,0.6
  silkscreen extent -2.17,-1.05 2.17,1.05
"SODFL519X262-2N (CMSH3-40MA)" [mm] "SODFL, 2-Leads, Body 2.60x5.19mm,"
  rect 2.15x1.8 smd: 1(-1.95,0) 2(1.95,0)
  silkscreen extent -2.87,-1.45 2.3,1.45, body extent -2.3,-1.46 2.3,1.46, height 2.62
"SOIC127P600X175-8N (LM234)" [mm] "SOIC, 8-Leads, Body 4.90x3.90mm, Pitch 1.27mm,"
  oval 1.45x0.6 smd: 1(-2.725,1.905) 2(-2.725,0.635) 3(-2.725,-0.635) 4(-2.725,-1.905) 5(2.725,-1.905) 6(2.725,-0.635) 7(2.725,0.635) 8(2.725,1.905)
  silkscreen extent -2.85,-2.5 1.6,2.88, body extent -2,-2.5 2,2.5, height 1.75
SOT90P240X110-3N [mm] "SOT23, 3-Leads, Body 2.90x2.40mm, Pitch 0.90mm, MMBT3904"
  rect 0.95x0.65 smd: 1(1.175,0) 2(-1.175,0.9) 3(-1.175,-0.9)
  silkscreen extent -0.3,-1.5 1.47,1.5, body extent -0.7,-1.5 0.7,1.5, height 1.1
"SOT95P240X100-3N (CMPSH1-4 TR)" [mm] "SOT23, 3-Leads, Body 2.90x2.40mm,"
  rect 0.8x0.6 smd: 1(-1.25,0.95) 2(-1.25,-0.95) 3(1.25,0)
  silkscreen extent -1.37,-1.5 0.85,1.78, body extent -0.85,-1.5 0.85,1.5, height 1
TP_LARGE [mm] "5016"
  rect 4.7x3.4 smd: 1(0,0)
TP_SMALL [mm] "5015"
  rect 3.4x1.8 smd: 1(0,0)
TP_TINY [mm] "1mm round tiny testpoint"
  round 1 smd: 1(0,0)
TSOP65P490X110-8N [mm] "TSOP, 8-Leads, Body 3.00x3.00mm, Pitch 0.65mm (MSOP-8, MCP79412)"
  rect 1.4x0.43 smd: 1(-2.2,0.975) 2(-2.2,0.325) 3(-2.2,-0.325) 4(-2.2,-0.975) 5(2.2,-0.975) 6(2.2,-0.325) 7(2.2,0.325) 8(2.2,0.975)
  silkscreen extent -1.57,-1.5 1.1,2, body extent -1.5,-1.5 1.5,1.5, height 1.1
"TSOP65P490X110_HS-13N (LT3652)" [mm] "TSOP, 12-Leads, Body 4.04x3.00mm, Pitch 0.65mm, Thermal Pad 2.95x1.76mm,"
  oval 1.35x0.43 smd: 1(-2.225,1.625) 2(-2.225,0.975) 3(-2.225,0.325) 4(-2.225,-0.325) 5(-2.225,-0.975) 6(-2.225,-1.625) 7(2.225,-1.625) 8(2.225,-0.975) 9(2.225,-0.325) 10(2.225,0.325) 11(2.225,0.975) 12(2.225,1.625)
  rect 1.76x2.95 smd: 13(0,0)
  silkscreen extent -2.37,-2.05 1.15,2.45, body extent -1.55,-2.05 1.55,2.05, height 1.1
TSOP80P1170X120-54N [mm] "TSOP, 54-Leads, Body 22.22x10.16mm,  (IS42S16400J)"
  oval 1.2x0.55 smd: 1(-5.75,10.4) 2(-5.75,9.6) 3(-5.75,8.8) 4(-5.75,8) 5(-5.75,7.2) 6(-5.75,6.4) 7(-5.75,5.6) 8(-5.75,4.8) 9(-5.75,4) 10(-5.75,3.2) 11(-5.75,2.4) 12(-5.75,1.6) 13(-5.75,0.8) 14(-5.75,0) 15(-5.75,-0.8) 16(-5.75,-1.6) 17(-5.75,-2.4) 18(-5.75,-3.2) 19(-5.75,-4) 20(-5.75,-4.8) 21(-5.75,-5.6) 22(-5.75,-6.4) 23(-5.75,-7.2) 24(-5.75,-8) 25(-5.75,-8.8) 26(-5.75,-9.6) 27(-5.75,-10.4) 28(5.75,-10.4) 29(5.75,-9.6) 30(5.75,-8.8) 31(5.75,-8) 32(5.75,-7.2) 33(5.75,-6.4) 34(5.75,-5.6) 35(5.75,-4.8) 36(5.75,-4) 37(5.75,-3.2) 38(5.75,-2.4) 39(5.75,-1.6) 40(5.75,-0.8) 41(5.75,0) 42(5.75,0.8) 43(5.75,1.6) 44(5.75,2.4) 45(5.75,3.2) 46(5.75,4) 47(5.75,4.8) 48(5.75,5.6) 49(5.75,6.4) 50(5.75,7.2) 51(5.75,8) 52(5.75,8.8) 53(5.75,9.6) 54(5.75,10.4)
  silkscreen extent -7.55,-11.2 7.52,11.35, body extent -5.15,-11.2 5.15,11.2, height 1.2
TSQFP50P2200X2200X160-144M [mm] "TSQFP, 144-Leads, Body 20.00x20.00mm, Pitch 0.50mm, STM32F429"
  oval 1.65x0.295 smd: 1(-10.825,8.75) 2(-10.825,8.25) 3(-10.825,7.75) 4(-10.825,7.25) 5(-10.825,6.75) 6(-10.825,6.25) 7(-10.825,5.75) 8(-10.825,5.25) 9(-10.825,4.75) 10(-10.825,4.25) 11(-10.825,3.75) 12(-10.825,3.25) 13(-10.825,2.75) 14(-10.825,2.25) 15(-10.825,1.75) 16(-10.825,1.25) 17(-10.825,0.75) 18(-10.825,0.25) 19(-10.825,-0.25) 20(-10.825,-0.75) 21(-10.825,-1.25) 22(-10.825,-1.75) 23(-10.825,-2.25) 24(-10.825,-2.75) 25(-10.825,-3.25) 26(-10.825,-3.75) 27(-10.825,-4.25) 28(-10.825,-4.75) 29(-10.825,-5.25) 30(-10.825,-5.75) 31(-10.825,-6.25) 32(-10.825,-6.75) 33(-10.825,-7.25) 34(-10.825,-7.75) 35(-10.825,-8.25) 36(-10.825,-8.75) 73(10.825,-8.75) 74(10.825,-8.25) 75(10.825,-7.75) 76(10.825,-7.25) 77(10.825,-6.75) 78(10.825,-6.25) 79(10.825,-5.75) 80(10.825,-5.25) 81(10.825,-4.75) 82(10.825,-4.25) 83(10.825,-3.75) 84(10.825,-3.25) 85(10.825,-2.75) 86(10.825,-2.25) 87(10.825,-1.75) 88(10.825,-1.25) 89(10.825,-0.75) 90(10.825,-0.25) 91(10.825,0.25) 92(10.825,0.75) 93(10.825,1.25) 94(10.825,1.75) 95(10.825,2.25) 96(10.825,2.75) 97(10.825,3.25) 98(10.825,3.75) 99(10.825,4.25) 100(10.825,4.75) 101(10.825,5.25) 102(10.825,5.75) 103(10.825,6.25) 104(10.825,6.75) 105(10.825,7.25) 106(10.825,7.75) 107(10.825,8.25) 108(10.825,8.75)
  oval 0.295x1.65 smd: 37(-8.75,-10.825) 38(-8.25,-10.825) 39(-7.75,-10.825) 40(-7.25,-10.825) 41(-6.75,-10.825) 42(-6.25,-10.825) 43(-5.75,-10.825) 44(-5.25,-10.825) 45(-4.75,-10.825) 46(-4.25,-10.825) 47(-3.75,-10.825) 48(-3.25,-10.825) 49(-2.75,-10.825) 50(-2.25,-10.825) 51(-1.75,-10.825) 52(-1.25,-10.825) 53(-0.75,-10.825) 54(-0.25,-10.825) 55(0.25,-10.825) 56(0.75,-10.825) 57(1.25,-10.825) 58(1.75,-10.825) 59(2.25,-10.825) 60(2.75,-10.825) 61(3.25,-10.825) 62(3.75,-10.825) 63(4.25,-10.825) 64(4.75,-10.825) 65(5.25,-10.825) 66(5.75,-10.825) 67(6.25,-10.825) 68(6.75,-10.825) 69(7.25,-10.825) 70(7.75,-10.825) 71(8.25,-10.825) 72(8.75,-10.825) 109(8.75,10.825) 110(8.25,10.825) 111(7.75,10.825) 112(7.25,10.825) 113(6.75,10.825) 114(6.25,10.825) 115(5.75,10.825) 116(5.25,10.825) 117(4.75,10.825) 118(4.25,10.825) 119(3.75,10.825) 120(3.25,10.825) 121(2.75,10.825) 122(2.25,10.825) 123(1.75,10.825) 124(1.25,10.825) 125(0.75,10.825) 126(0.25,10.825) 127(-0.25,10.825) 128(-0.75,10.825) 129(-1.25,10.825) 130(-1.75,10.825) 131(-2.25,10.825) 132(-2.75,10.825) 133(-3.25,10.825) 134(-3.75,10.825) 135(-4.25,10.825) 136(-4.75,10.825) 137(-5.25,10.825) 138(-5.75,10.825) 139(-6.25,10.825) 140(-6.75,10.825) 141(-7.25,10.825) 142(-7.75,10.825) 143(-8.25,10.825) 144(-8.75,10.825)
  silkscreen extent -13.05,-13.05 13.05,13.05, body extent -10,-10 10,10, height 1.6
TSSOP50P490X110_HS-11N [mm] "TSSOP, 10-Leads, Body 3.00x3.00mm, Pitch 0.50mm, Thermal Pad 1.88x1.68mm, IPC Medium Density"
  oval 1.35x0.29 smd: 1(-2.225,1) 2(-2.225,0.5) 3(-2.225,0) 4(-2.225,-0.5) 5(-2.225,-1) 6(2.225,-1) 7(2.225,-0.5) 8(2.225,0) 9(2.225,0.5) 10(2.225,1)
  rect 1.68x1.88 smd: 11(0,0)
  silkscreen extent -2.35,-1.55 1.15,1.82, body extent -1.55,-1.55 1.55,1.55, height 1.1
XTAL-SOJ-4 [mm]
  rect 1.9x1.3 smd: 1(0,0)
  oval 1.9x1.3 smd: 2(0,-5.5) 3(3.2,-5.5) 4(3.2,0)
  silkscreen extent -0.75,-6.88 3.2,1.25, body extent -0.3,-6.9 3.5,1.1, height 2.5

## Part data
C100 C101 C102 C103 C104 C105 C106 C107 C108 C109 C110 C111 C112 C113 C114 C115 C116 C117 C118 C119 C120 C121 C122 C124 C200 C201 C202 C203 C204 C205 C206 C207 C300 C301 C302 C303 C304 C305 C400 C401 C402 C403 C404 C405 C406 C407 C408 C500 C501 C502 C503 C504 C505 C506 C507 C600 C601 C700 C701 C702: library part Cap, "Capacitor"
D200 D201 D202: library part "D Schottky", "Schottky Diode"
D203 D204 D400: library part LED0
D300 D301 D305: library part LED0, "Typical INFRARED GaAs LED"
J100: library part HDR_FTDI, "Sparkfun FTDI pinout connector"
J101 JP700: library part "Header 2X2", "Header, 2-Pin, Dual row"
J102: library part "Header 8X2", "Header, 8-Pin, Dual row"
J103: library part HDR_SWD_2x6, "6 pin SWD connector with +6 GND pins"
J200: library part 691322110005, "WR-TBL Terminal block - serie 3221 - 3.50 mm"
J400: library part "Header 4", "Header, 4-Pin"
J600: library part CAMERA_2x10, "20-pin parallel camera connector for OV5642"
J700: library part HDR_FTDI_EXTENDED
J701: library part "Header 6X2", "Header, 6-Pin, Dual row"
JP200: library part JP-3, "3-pos Jumper"
L200 L400: library part Inductor, "Inductor"
MTGH1 MTGH2 MTGH3 MTGH4: library part MTGH, "Mounting hole"
Q300: library part 2N3904, "NPN General Purpose Amplifier"
Q700 Q701: library part MOSFET-N, "N-Channel MOSFET"
R101 R102 R103 R104 R105 R106 R107 R108 R109 R110 R200 R201 R202 R203 R204 R205 R206 R207 R208 R210 R300 R301 R302 R303 R304 R308 R400 R401 R402 R404 R405 R406 R500 R501 R502 R600 R601 R602 R700 R701 R702 R703 R704 R705 R706 R707 R708 R709 R710 R711 R712: library part Res1, "Resistor"
RR500 RR501 RR502 RR503 RR504 RR505 RR506 RR507 RR508 RR600 RR601 RR602: library part RES_ARR_4, "4 element resistor array"
SJ100 SJ101 SJ102 SJ106 SJ107 SJ108 SJ109 SJ112 SJ200 SJ201 SJ300 SJ301 SJ700: library part SJ, "Solder jumper"
SW100 SW101 SW700: library part "WS-TASV, 434121043816", "WS-TASV 6.0x3.5 mm SMD"
TP100 TP101 TP104 TP203 TP204 TP205 TP207 TP208 TP209 TP300 TP301 TP302 TP304 TP305 TP306 TP600 TP601 TP700 TP701: library part TP_SMALL
TP105 TP106 TP200 TP303 TP702: library part TP_LARGE
TP500 TP501: library part TP_TINY
U100: library part STM32F429, "Cortex-M4 microcontroller"
U200: library part LT3652, "MPPC and battery charger"
U201: library part LM234, "Adjustable current source"
U203: library part LTC2943A, "Multi-cell I2C fuel gauge"
U300: library part MCP7941x, "I2C RTC w/ SRAM and EEPROM"
U301: library part EMC1412, "Dual channel I2C temperature sensor"
U302: library part LTC2054/LTC2055, "Dual zero-drift op amp"
U400: library part LT8608, "42V 1.5A step-down, low Iq"
U500: library part IS42S16400J, "1Mb x 16 x 4 bank (64 Mbit) SDRAM"
U700: library part "ESP8266 ESP-12-E", "ESP8266 ESP-12-E"
VR200: library part TrimPot
Y100: library part XTAL, "Crystal Oscillator"
Y101 Y300: library part XTAL-SOJ-4

## Via types
v1: diameter 20, hole 10, Top Layer to Bottom Layer, 392 vias
v2: diameter 20, hole 10, Top Layer to Bottom Layer, tented both sides, 14 vias
v3: diameter 47.24, hole 23.62, Top Layer to Bottom Layer, 13 vias
v4: diameter 24, hole 8, Top Layer to Bottom Layer, 10 vias
v5: diameter 20, hole 10, Top Layer to Bottom Layer, tented top, 4 vias